# Altium PCB uku207_220_2.PcbDoc (part 1 of 4)
Units mm, origin at the board's own origin, x right, y up, seen from the top; angles counter-clockwise.
Board outline 334.15 x 155.4 mm, 2 copper layers (Top Layer, Bottom Layer); 372 components, 588 nets, 1281 pads, 677 vias.
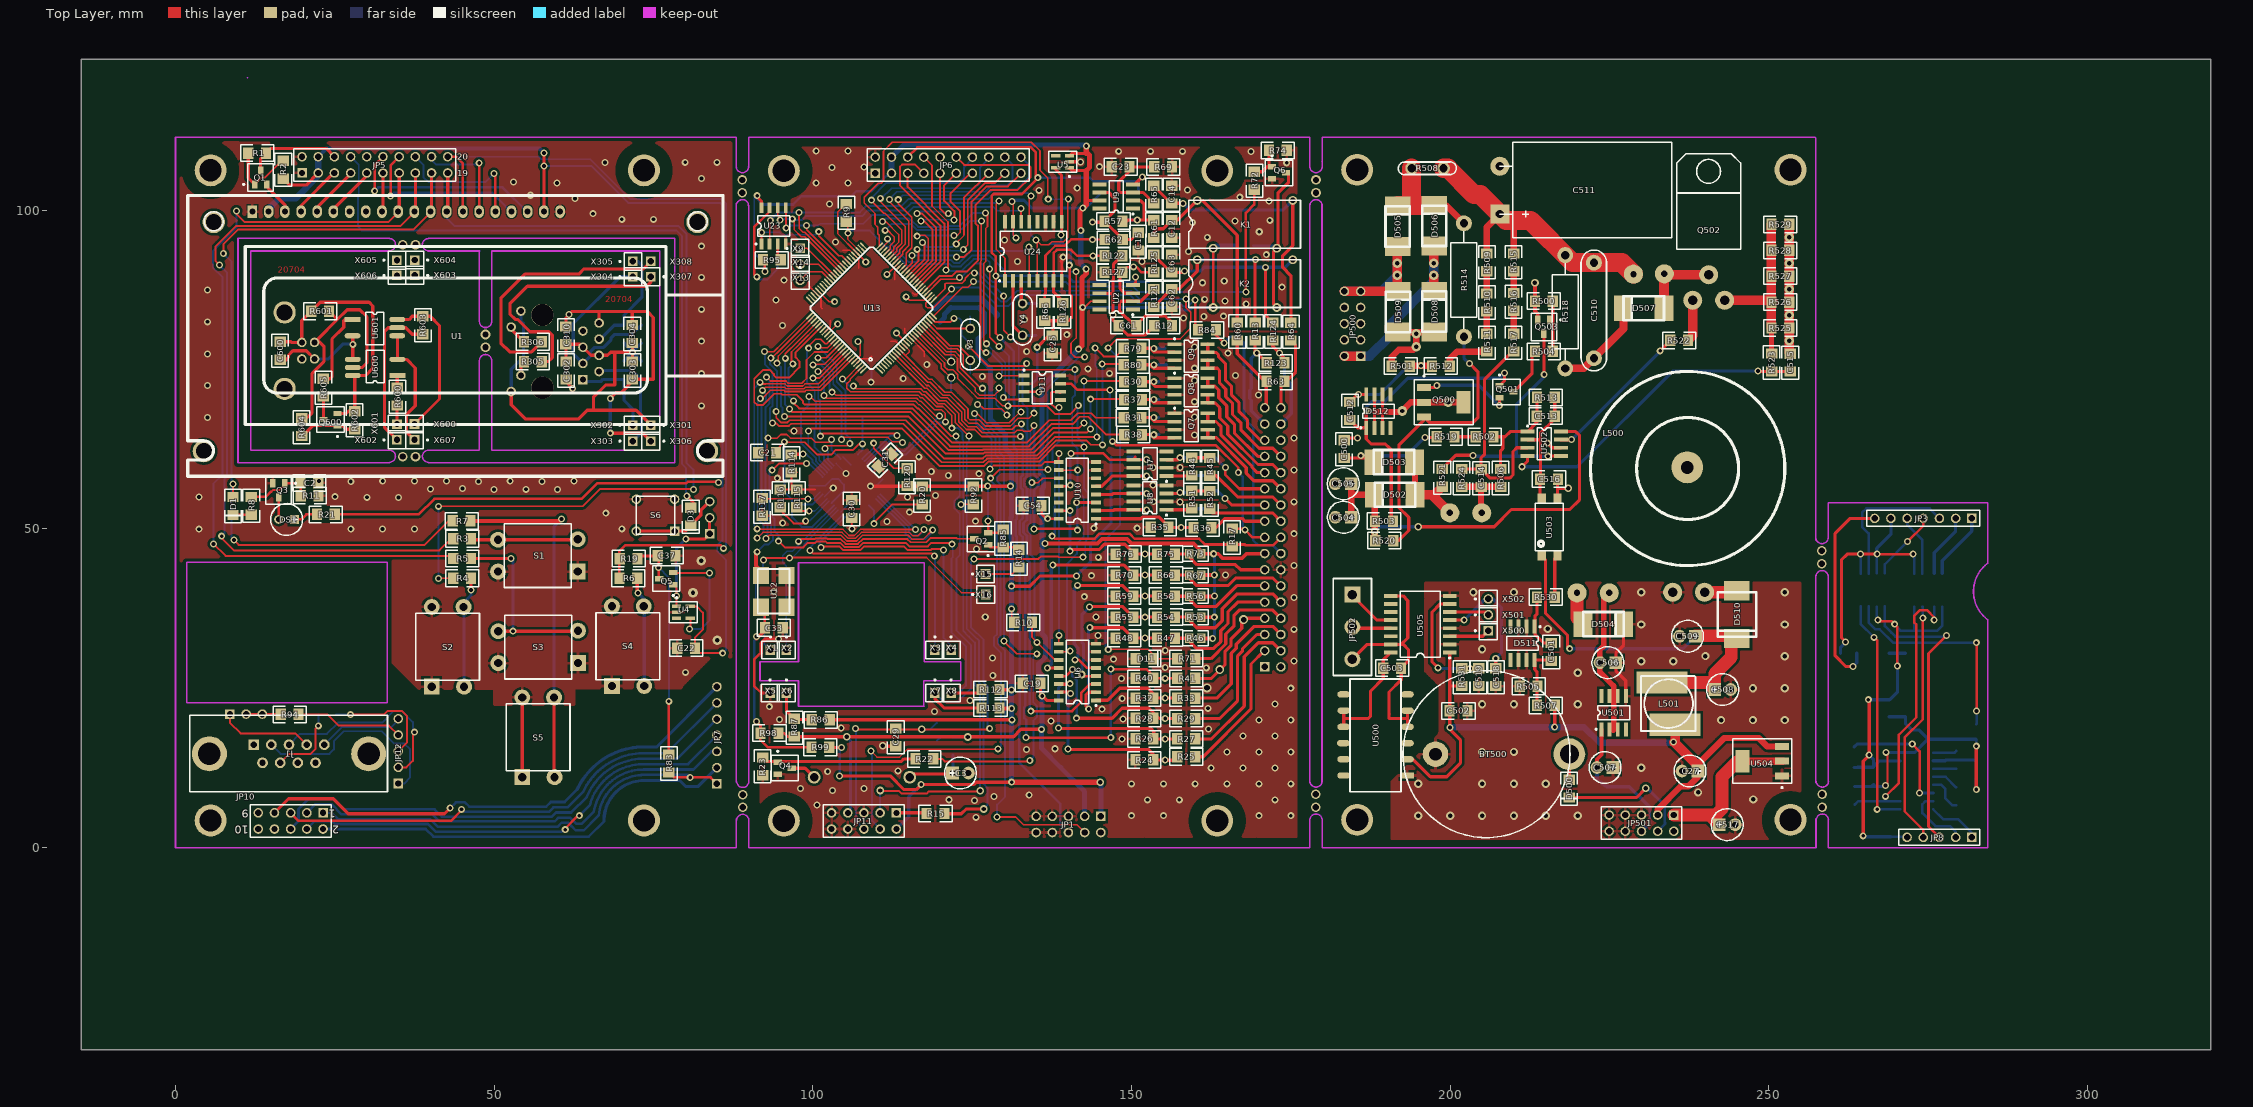
[diagram p0: Top Layer view]
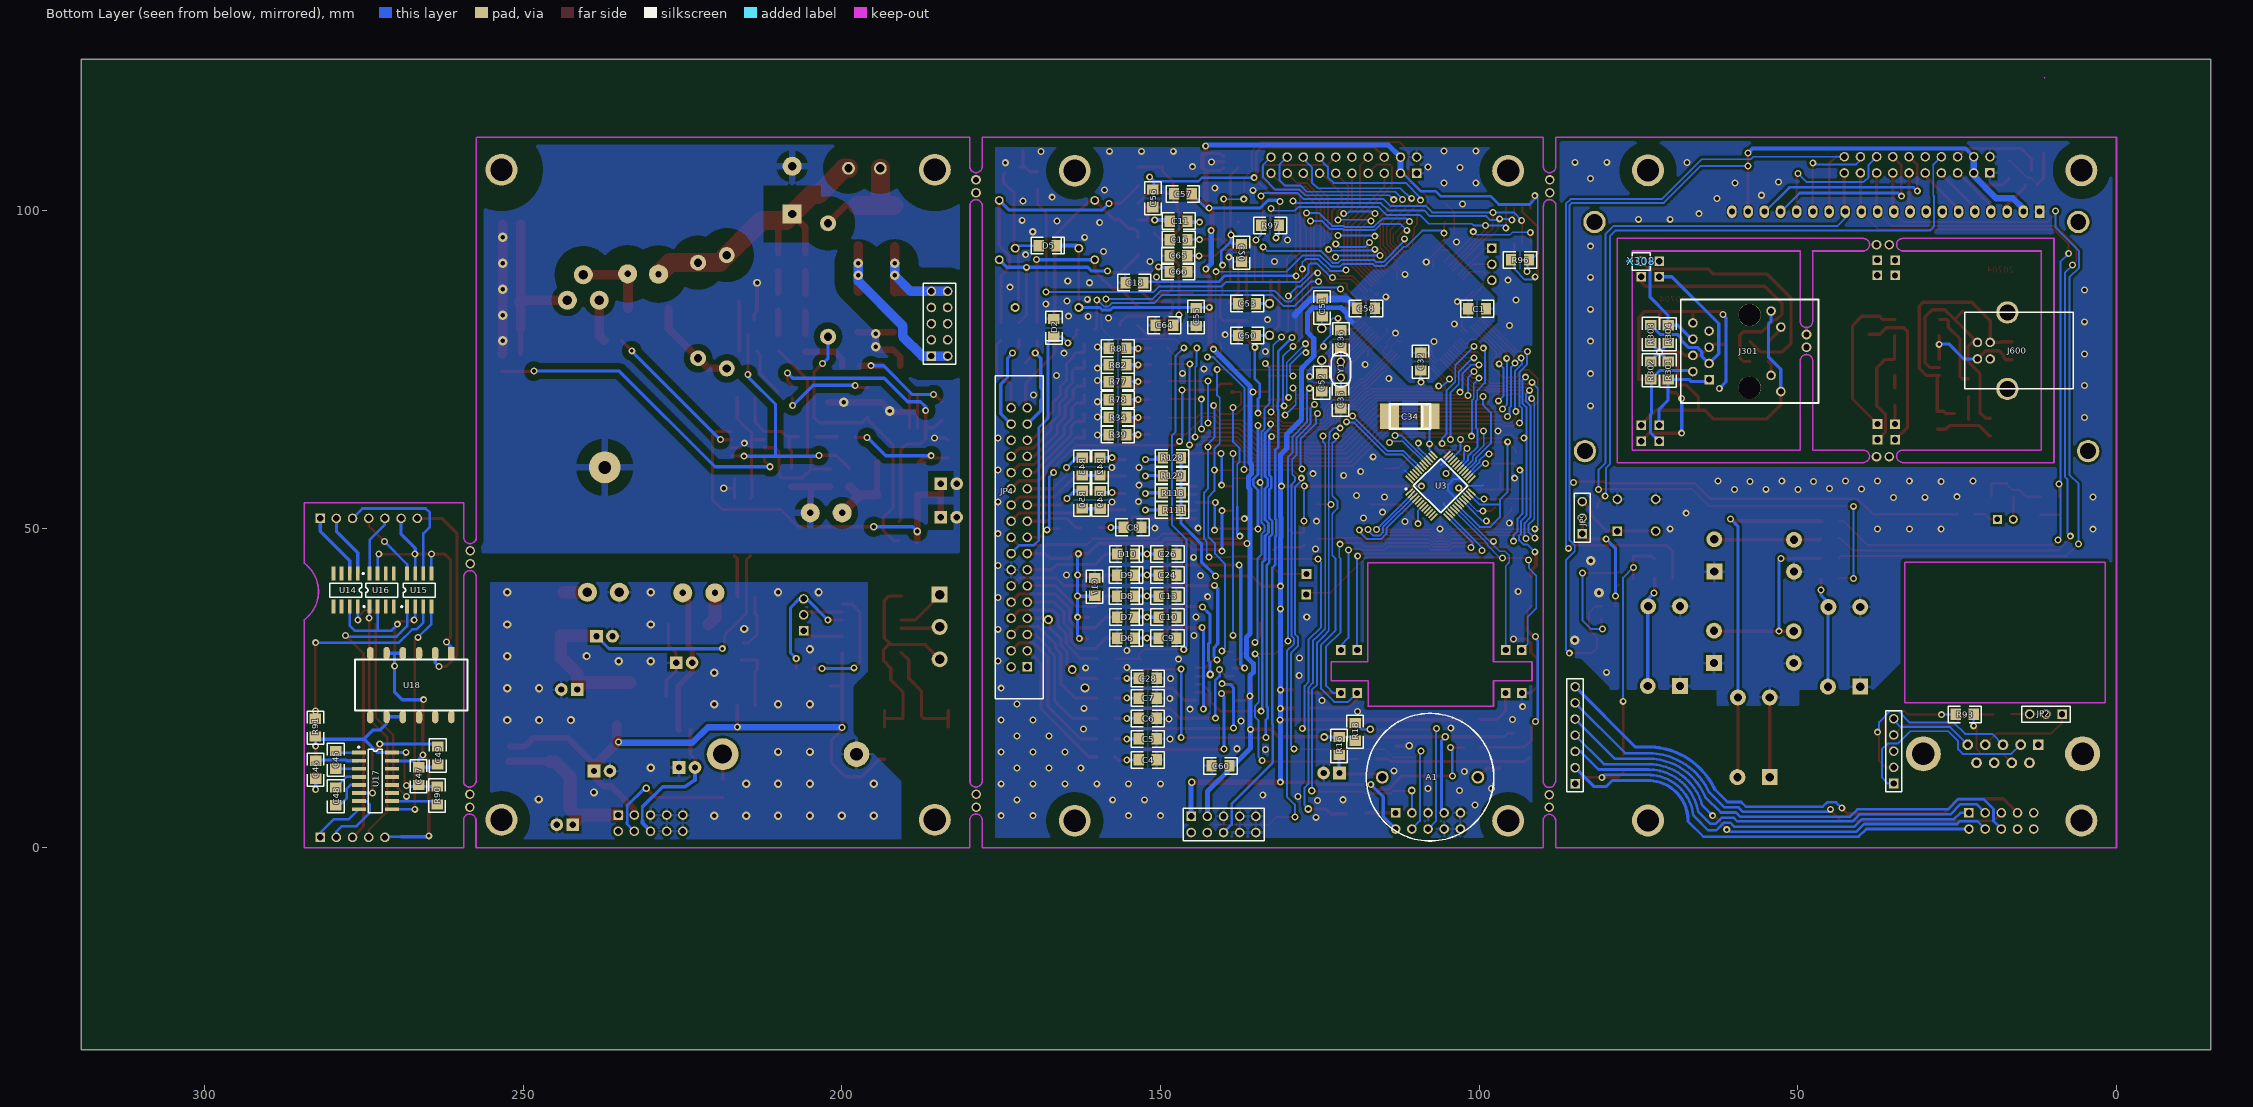
[diagram p1: Bottom Layer view, seen from below]

## Layer stack, top to bottom
Top Layer: signal copper 0.0356
Dielectric: dielectric 0.32, FR-4, Dk 4.8
Bottom Layer: signal copper 0.0356

## Board outline
-14.803,123.7 -14.803,-31.7 319.347,-31.7 319.347,123.7

## Design rules (kind name [scope] priority, off if disabled: settings)
Clearance Clearance_2 [InNet('NetD506_1') or
InNet('NetD505_2') or
InNet('NetC510_2') or
InNet('NetD505_1') or
InNet('NetD507_1') vs InPoly] p1: gap=3
Clearance Clearance_4 [InNet(NetC500_1) vs HasPad('Free-0')] p2: gap=4
Clearance Holes [InPoly vs HasPad('Free-0') Or HasPad('Free-1') Or HasPad('Free-2') Or HasPad('Free-3')] p3: gap=2
Clearance Clearance_3 [InPoly and InNet(NetC500_1)] p4: gap=1
Clearance Clearance_1 [InComponent(U1)] p5: gap=0.19
Clearance Keep_Out [OnLayer('Keep-Out Layer')] p6: gap=0.5
Clearance Poly [InPoly] p7: gap=0.4
Clearance [All] p8: gap=0.18
ComponentClearance [All] p1: gap=0.254 collisioncheckmode=0
HoleSize [All] p1: absolutevalues=TRUE maxlimit=5 minlimit=0.025 maxpercent=80.000 minpercent=20.000
PolygonConnect PolygonConnect_2 [InNet('NetC500_1')] p1: connectstyle=Relief reliefconductorwidth=1 reliefentries=4 polygonreliefangle="90 Angle"
PolygonConnect PolygonConnect_1 [InNet(NetC100_2)] p2: connectstyle=Direct reliefconductorwidth=0.254 reliefentries=4 polygonreliefangle="90 Angle"
PolygonConnect [All] p3: connectstyle=Relief reliefconductorwidth=0.4 reliefentries=4 polygonreliefangle="90 Angle"
RoutingLayers [All] p1: top layer=Horizontal bottom layer=Vertical
RoutingVias [All] p1: holewidth=0.6 width=1.1 viastyle="Through Hole" minholewidth=0.6 minwidth=1.1 maxholewidth=0.7 maxwidth=1.2
SolderMaskExpansion [All] p1: expansion=0.102
TestPointUsage [All] p1: valid=0 allowmultiple=FALSE
Testpoint [All] p1: side=15 testpointundercomponent=TRUE minsize=1.016 maxsize=2.54 preferedsize=1.524 minholesize=0 maxholesize=1.016 preferedholesize=0.813 testpointgrid=0.025 style=1023 order=-539222988
Width [All] p1: maxlimit=5 minlimit=0.2 preferedwidth=0.254 toplayer_prefwidth=0.5 bottomlayer_prefwidth=0.4 minimp=50.000000 maximp=50.000000 favimp=50.000000
15 further rules are at their usual default settings.

## Classes and differential pairs
component class POWER: BT500 C27 C500 C501 C502 C503 C504 C505 C506 C507 C508 C509 C510 C511 C512 C513 C514 C515 C516 C517 C518 C519 D500 D502 D503 D504 D505 D506 D507 D508 D509 D510 D511 D512 JP500 JP501 JP502 L500 L501 Q500 Q501 Q502 Q503 R500 R501 R502 R503 R504 R505 R506 R507 R508 R509 R510 R511 R512 R513 R514 R515 R516 R517 R518 R519 R520 R521 R522 R523 R524 R525 R526 R527 R528 R529 R530 R531 U500 U501 U502 U503 U504 U505 X500 X501 X502
component class LAN: C302 C303 C304 C310 J301 R301 R302 R303 R304 R305 R306 X301 X302 X303 X304 X305 X306 X307 X308
component class uku206: A? BT? C2 C22 C37 D1 D3 DS1 JP5 JP9 Q1 Q3 Q5 R1 R2 R3 R4 R5 R6 R7 R8 R11 R19 R21 R83 S1 S2 S3 S4 S5 S6 U1 U4 UU1 UU3 UU5 UU7 UU9 X17
component class IBPV11: +IAKB1 C4 C5 C6 C7 C8 C9 C10 C11 C12 C13 C14 C15 C16 C17 C18 C19 C20 C23 C24 C25 C26 C28 C61 C62 C63 C64 C65 C66 D5 D6 D7 D8 D9 D10 D11 K1 K2 NetC25_1 NetJ1_2 NetU14_4 NetU14_5 P0_3 P0_8_ P0_9_ P1_29 P1_31 PROG1 Q6 Q7 Q8 Q9 R12 R13 R24 R25 R26 R27 R28 R29 R30 R31 R32 R33 R34 R35 R36 R37 R38 R39 R40 R41 R42 R43 R44 R45 R46 R47 R48 R49 R50 R51 R52 R53 R54 R55 R56 R57 R58 R59 R60 R61 R62 R63 R64 R65 R66 R67 R68 R69 R70 R71 R72 R73 R74 R75 R76 R77 R78 R79 R80 R81 R82 R111 R118 R121 R122 R123 R124 R125 R126 R127 R128 R129 U2 U6 U7 U8 U9 U10 UU2 X39 X40 X41 X42 X43 X44 X45 X46 X47
component class ETH: C21 C30 C31 C32 C33 C34 Q2 R14 R20 R85 R86 R87 R98 R99 R112 R113 R114 R115 R116 R117 R120 U3 U12 X1 X2 X3 X4 X5 X6 X7 X8 X15 X16
component class Designator: C45 C46 C47 C48 C49 J1 JP2 JP3 JP7 JP8 JP10 JP12 R90 R91 R93 R94 U14 U15 U16 U17 U18 X36
component class CPU: A1 C1 C3 C29 C35 C36 C50 C51 C52 C53 C54 C55 C56 C57 C58 C60 D2 JP1 JP4 JP6 JP11 Q4 R9 R10 R15 R16 R17 R18 R22 R23 R84 R92 R95 R96 R97 U5 U11 U13 U23 U24 X9 X13 X14 Y1 Y3 Y4
component class CAN-PDH: C600 J600 Q600 R600 R601 R602 R603 R604 R605 U600 U601 X600 X601 X602 X603 X604 X605 X606 X607

## Components (designator, comment, footprint, x,y, rotation, side; value= is the part's Value field where it differs from the comment)
A1 "EFM260" Pjezo15 102.7,11.05 r0 bottom
BT500 "CR2032" BAT_SUPP 205.7,14.65 r270 top
C1 "1.0" _1206#1 100.3,84.55 r180 bottom
C2 "1.0" _1206#2 21,57.2 r180 top
C3 "100 x 16" el3#1 121.897,11.7 r0 top
C4 "1.0" _1206#3 152,13.75 r180 bottom (schematic designator C11)
C5 "1.0" _1206#3 152,17.05 r180 bottom
C6 "1.0" _1206#3 152,20.25 r180 bottom (schematic designator C7)
C7 "1.0" _1206#3 152,23.45 r180 bottom (schematic designator C13)
C8 "1.0" _1206#3 154.4,50.25 r180 bottom (schematic designator C?)
C9 "1.0" _1206#3 148.9,32.85 r180 bottom (schematic designator C8)
C10 "1.0" _1206#3 148.9,36.15 r180 bottom (schematic designator C16)
C11 "0.1" _1206#3 147.15,98.3 r0 bottom
C12 "1.0" _1206#3 156.3,97.05 r90 top
C13 "1.0" _1206#3 148.9,39.45 r180 bottom
C14 "1.0" _1206#3 156.3,102.45 r270 top
C15 "1.0" _1206#3 151.05,95.074 r90 top
C16 "1.0" _1206#3 147.15,95.4 r180 bottom
C17 "1.0" _1206#3 160.34,40.91 r270 bottom
C18 "1.0" _1206#3 154.1,88.65 r180 bottom
C19 "1.0" _1206#3 134.334,25.75 r0 top
C20 "1.0" _1206#3 137.285,93.303 r90 bottom
C21 "0.1" _1206#4 92.823,61.966 r180 top
C22 "1.0" _1206#1 80.1,31.3 r180 top (schematic designator C?)
C23 "0.1" _1206#3 148.287,106.827 r180 top
C24 "1.0" _1206#3 148.9,42.75 r180 bottom
C25 "1.0" _1206#3 137.6,78.95 r90 top
C26 "1.0" _1206#3 148.9,46.05 r180 bottom
C27 "nichicon 330x16" el3#1 238.897,12 r180 top (schematic designator C?)
C28 "1.0" _1206#3 152,26.55 r180 bottom
C29 "0.1" _1206#4 113,17.3 r90 top
C30 "0.1" _1206#1 106.1,53.1 r270 top
C31 "0.1" _1206#1 111.327,60.764 r45 top
C32 "0.1" _1206#1 109.176,76.218 r270 bottom
C33 "0.1" _1206#1 93.9,34.5 r0 top
C34 "10.0x25 tantal" CAP_EL_6_3 107.7,67.65 r0 bottom
C35 "33" _1206#1 121.75,70.3 r90 bottom
C36 "33" _1206#1 121.7,79.75 r270 bottom
C37 "0.1" _1206#4 77.05,45.8 r180 top
C45 "1.0" _1206#3 279.403,13.747 r90 bottom
C46 "1.0" _1206#1 282.553,12.197 r270 bottom
C47 "1.0" _1206#3 266.403,11.197 r90 bottom
C48 "1.0" _1206#3 279.403,8.047 r270 bottom
C49 "1.0" _1206#3 263.403,14.447 r270 bottom
C50 "10" _1206#1 136.4,80.35 r180 bottom
C51 "10" _1206#3 124.65,84.75 r270 bottom
C52 "10" _1206#3 124.7,72.95 r90 bottom
C53 "10" _1206#1 136.4,85.35 r180 bottom
C54 "1.0" _1206#3 134.484,53.664 r0 top
C55 "1.0" _1206#3 144.4,83.25 r90 bottom
C56 "1.0" _1206#3 151.2,101.85 r90 bottom
C57 "1.0" _1206#3 146.5,102.55 r180 bottom
C58 "1.0" _1206#1 117.75,84.6 r180 bottom
C60 "1.0" _1206#3 140.585,12.803 r180 bottom
C61 "0.1" _1206#3 149.35,81.9 r0 top
C62 "1.0" _1206#3 156.3,86.25 r90 top
C63 "1.0" _1206#3 156.3,91.65 r270 top
C64 "1.0" _1206#3 149.4,81.95 r180 bottom
C65 "1.0" _1206#3 147.2,92.85 r180 bottom
C66 "0.1" _1206#3 147.2,90.35 r180 bottom
C302 "0.1" _1206#4 61.269,74.866 r90 top
C303 "0.1" _1206#4 71.669,74.866 r90 top
C304 "0.1" _1206#4 71.669,80.566 r270 top
C310 "0.1" _1206#4 61.269,80.366 r270 top (schematic designator C301)
C500 "1.0" _1206#4 183.35,62.5 r270 top
C501 "0.1" _1206#4 215.85,30.7 r90 top
C502 "22.0" _1206#1 201.3,21.45 r180 top
C503 "22.0" _1206#1 190.9,28.15 r0 top
C504 "LXZ 22.0x50" el3#1 184.496,51.813 r180 top
C505 "LXZ 22.0x50" el3#1 184.488,57.073 r180 top
C506 "LXZ 22.0x50" el3#1 226.007,29.007 r180 top
C507 "LXZ 22.0x50" el3#1 225.557,12.553 r180 top
C508 "nichicon 330x16" el3#1 241.497,24.8 r0 top
C509 "nichicon 330x16" el3#1 238.5,33.15 r180 top
C510 "0.1x630" c15 222.556,84.271 r90 top
C511 "10.0x450" el_15_25_h 207.797,103.15 r270 top
C512 "10n" _1206#4 184.246,68.517 r90 top
C513 "390" _1206#4 215.004,67.717 r0 top
C514 "1n0" _1206#4 204.85,57.95 r270 top
C515 "1n0" _1206#4 253.35,76.1 r90 top
C516 "3n3" _1206#4 215.504,57.815 r180 top
C517 "LXZ 220x16" el3#1 242.211,3.601 r0 top
C518 "1n0" _1206#1 207.15,26.75 r90 top
C519 "1.0" _1206#1 204.45,26.75 r90 top
C600 "1.0" _1206#3 16.4,77.95 r90 top
D1 "LL4148" _1206d#1 9,53.6 r90 top
D2 "BZV55-C3V9" _1206d#2 166.7,81.55 r90 bottom
D3 "LL4148" _1206d#2 80.85,51.9 r90 top
D5 "LL4148" _1206d#3 167.7,94.45 r0 bottom
D6 "BZV55-C5V6" _1206d#4 155.4,32.85 r0 bottom
D7 "BZV55-C5V6" _1206d#4 155.4,36.15 r0 bottom
D8 "BZV55-C5V6" _1206d#3 155.4,39.45 r0 bottom
D9 "BZV55-C5V6" _1206d#3 155.4,42.75 r0 bottom
D10 "BZV55-C5V6" _1206d#4 155.4,46.05 r0 bottom
D11 "BZV55-C3V9" _1206d#4 152,29.65 r180 top
D500 "LL4148" _1206d#5 218.65,9.25 r90 top
D502 "MBRS1100T3G" D_6_3 188.147,55.364 r0 top
D503 "MBRS1100T3G" D_6_3 188.047,60.465 r0 top
D504 "MBRS1100T3G" D_6_3 227.207,35.059 r180 top
D505 "STTH112" D_6_3 191.748,100.625 r270 top
D506 "STTH112" D_6_3 197.5,100.725 r270 top
D507 "STTH112" D_6_3 227.207,84.621 r0 top
D508 "STTH112" D_6_3 197.5,87.25 r270 top
D509 "STTH112" D_6_3 191.798,87.222 r270 top
D510 "30BQ100" 30BQ100 244.997,36.55 r90 top
D511 "TL431ACD" SO-G8#1 211.35,32.05 r180 top
D512 "TL431ACD" SO-G8#1 188.748,68.467 r0 top
DS1 "LED0" el3#2 18.697,51.477 r180 top
J1 "DBR9M" DSUB_N9 17.75,16.25 r0 top
J301 "J0011D21B" J0011D21B 57.569,77.866 r270 bottom
J600 "USB_B" USB_B 21.8,77.95 r90 bottom
JP1 "PBD-10" HDR2X5#1 145.187,4.901 r180 top
JP2 "PLS-3" HDR1X3#1 8.547,20.95 r0 bottom
JP3 "PLS-7" HDR1X7 281.85,51.647 r180 top
JP4 "IDC-34" IDC34M 170.9,28.35 r90 bottom
JP5 "PLHD-20" HDR2X10 19.85,105.85 r0 top
JP6 "PBD-20" HDR2X10 109.8,105.8 r0 top
JP7 "PLS-7" HDR1X7 84.948,10 r90 top
JP8 "PLS-5" HDR1X5 281.85,1.6 r180 top
JP9 "PLS-3" HDR1X3#2 83.821,49.212 r90 bottom
JP10 "PLHD-10" HDR2X5#1 23.147,5.45 r180 top
JP11 "PBD-10" HDR2X5#2 113.1,5.45 r180 top
JP12 "PLS-5" HDR1X5 34.95,10.05 r90 top
JP500 "IDC-10" HDR2X5#1 185.947,77.119 r90 top
JP501 "PLHD-10" HDR2X5#1 235.098,5.1 r180 top
JP502 "Header 3" 2EDG-5.08-3P 184.65,39.7 r270 top
K1 "DH1A" kuan 160.3,94.05 r0 top
K2 "DH1A" kuan 160.3,84.75 r0 top
L500 "L220-K10" trans_ring1 237.26,59.465 r0 top
L501 "SDR0805-390KL" L10x10 239.36,27.657 r180 top
Q1 "BC856" SO-G3#1 13.35,105.15 r0 top
Q2 "BC856" SO-G3#1 126.4,48.45 r90 top
Q3 "BC846" SO-G3#2 16.2,56.05 r180 top
Q4 "BC846" SO-G3#1 95.6,12.45 r270 top
Q5 "IRLML2402" SO-G3#1 77,42.2 r90 top (schematic designator Q?)
Q6 "BC846" SO-G3#1 173.15,105.877 r270 top
Q7 "IRF7301" SO-G8/Y2.2#1 159.35,66.2 r270 top
Q8 "IRF7301" SO-G8/Y2.2#2 159.35,71.7 r270 top
Q9 "IRF7301" SO-G8/Y2.2#2 159.35,77.1 r270 top
Q500 "NSS40300MZ4" DSO-G3 199,69.868 r270 top
Q501 "BC856" SO-G3#1 208.85,71.5 r270 top
Q502 "STP4NK80Z" TO220_h 240.561,101.376 r0 top
Q503 "BC846" SO-G3#1 214.7,81.7 r180 top
Q600 "BC856" SO-G3#3 24.3,67.15 r90 top
R1 "2K2" _1206#5 12.797,108.95 r180 top (schematic designator R90)
R2 "2K4" _1206#5 16.897,106.35 r270 top (schematic designator R89)
R3 "2K7" _1206#1 44.95,48.45 r180 top
R4 "2K7" _1206#1 44.95,42.25 r180 top
R5 "2K7" _1206#1 44.95,45.35 r180 top
R6 "2K7" _1206#1 71.05,42.25 r180 top
R7 "2K7" _1206#5 44.9,51.25 r180 top (schematic designator R11)
R8 "2K7" _1206#2 11.9,53.6 r270 top
R9 "10K" _1206#1 105.275,99.574 r270 top
R10 "2K7" _1206#1 132.984,35.309 r180 top
R11 "10K" _1206#2 21.05,55.25 r0 top
R12 "20K" _1206#1 154.95,81.9 r180 top
R13 "10R" _1206#1 169.4,80.95 r270 top
R14 "1K0" _1206#1 132.332,45.31 r270 top
R15 "K20" _1206#1 119.25,5.35 r0 top
R16 "1K0" _1206#1 121.981,15.954 r90 bottom
R17 "K10" _1206#3 165.8,48.65 r90 top
R18 "51K" _1206#4 119.45,18.15 r270 bottom
R19 "10K" _1206#4 71.097,45.35 r0 top
R20 "10K" _1206#1 117.15,55.25 r90 top
R21 "K27" _1206#2 23.603,52.277 r0 top
R22 "1K0" _1206#1 117.48,13.904 r180 top
R23 "10K" _1206#1 92.1,12.75 r90 top
R24 "1K0" _1206#1 152,13.75 r180 top
R25 "33K" _1206#1 158.6,14.253 r0 top
R26 "1K0" _1206#1 152,17.05 r180 top
R27 "33K" _1206#1 158.6,17.05 r0 top
R28 "1K0" _1206#1 152,20.25 r180 top
R29 "33K" _1206#1 158.6,20.25 r0 top
R30 "1K0" _1206#1 150.25,73.1 r0 top
R31 "1K0" _1206#1 150.2,67.45 r0 top
R32 "1K0" _1206#1 152,23.45 r180 top
R33 "33K" _1206#1 158.6,23.45 r0 top
R34 "10K" _1206#1 156.7,67.5 r180 bottom
R35 "1K0" _1206#1 154.4,50.25 r180 top (schematic designator R?)
R36 "33K" _1206#1 161.141,50.163 r0 top (schematic designator R?)
R37 "1K0" _1206#1 150.25,70.3 r0 top
R38 "1K0" _1206#5 150.25,64.8 r0 top
R39 "10K" _1206#1 156.7,64.8 r180 bottom
R40 "1K0" _1206#1 152,26.55 r180 top
R41 "10K" _1206#1 158.6,26.55 r0 top
R42 "6K2" _1206#5 159.49,59.765 r90 bottom
R43 "6K2" _1206#1 162.291,59.765 r270 bottom
R44 "6K2" _1206#1 159.49,59.765 r270 top
R45 "6K2" _1206#1 162.291,59.75 r90 top
R46 "1K0" _0805 160,32.85 r0 top
R47 "2K7" _1206#1 155.4,32.85 r180 top
R48 "10K" _1206#1 148.9,32.85 r0 top
R49 "6K2" _1206#1 159.49,54.564 r90 bottom
R50 "6K2" _1206#1 162.291,54.564 r270 bottom
R51 "6K2" _1206#1 159.49,54.564 r270 top
R52 "6K2" _1206#1 162.291,54.564 r90 top
R53 "1K0" _0805 160,36.15 r0 top
R54 "2K7" _1206#1 155.4,36.15 r180 top
R55 "10K" _1206#1 148.9,36.15 r0 top
R56 "1K0" _0805 160,39.45 r0 top
R57 "20K" _1206#1 147.15,98.3 r180 top
R58 "2K7" _1206#1 155.4,39.45 r180 top
R59 "10K" _1206#1 148.9,39.45 r0 top
R60 "10R" _1206#1 166.6,80.95 r270 top
R61 "2K0" _1206#1 153.5,97.05 r90 top
R62 "20K" _1206#1 147.2,95.4 r180 top
R63 "10R" _1206#5 172.6,73.15 r180 top
R64 "10R" _1206#5 175,80.95 r270 top
R65 "2K0" _1206#5 153.5,102.45 r270 top
R66 "20K" _1206#1 136.4,84.05 r270 top
R67 "1K0" _0805 160,42.711 r0 top
R68 "2K7" _1206#1 155.4,42.75 r180 top
R69 "20K" _1206#1 154.95,106.8 r180 top
R70 "10K" _1206#1 148.9,42.75 r0 top
R71 "20K" _1206#1 158.6,29.65 r0 top
R72 "1K0" _1206#5 169.293,104.626 r90 top
R73 "1K0" _0805 160,46.112 r0 top
R74 "10K" _1206#1 172.944,109.378 r180 top
R75 "2K7" _1206#1 155.4,46.05 r180 top
R76 "10K" _1206#5 148.9,46.05 r0 top
R77 "10K" _1206#1 156.7,73.1 r180 bottom
R78 "10K" _1206#1 156.7,70.3 r180 bottom
R79 "1K0" _1206#1 150.2,78.35 r0 top
R80 "1K0" _1206#1 150.2,75.75 r0 top
R81 "10K" _1206#1 156.7,78.35 r180 bottom
R82 "10K" _1206#1 156.7,75.75 r180 bottom
R83 "10K" _1206#4 77.4,13.2 r90 top
R84 "20K" _1206#3 161.839,81.219 r180 top
R85 "K51" _1206#1 129.831,48.511 r90 top
R86 "1R0" _1206#1 101.25,20.05 r0 top
R87 "1R0" _1206#1 97.1,18.8 r270 top
R90 "1K0" _1206#1 263.503,8.147 r270 bottom
R91 "K20" _1206#1 282.6,18.797 r270 bottom
R92 "1K0" _1206#1 125.182,55.25 r90 top
R93 "1K0" _1206#1 23.797,20.9 r180 bottom
R94 "1K0" _1206#1 17.897,20.9 r180 top
R95 "2K7" _1206#1 93.55,92.2 r180 top
R96 "2K7" _1206#1 93.6,92.2 r0 bottom
R97 "1K0" _1206#1 132.783,97.625 r180 bottom
R98 "1R0" _1206#1 93.2,17.95 r0 top
R99 "1R0" _1206#1 101.2,15.75 r0 top
R111 "1K0" _1206#1 148.2,52.95 r0 bottom (schematic designator R?)
R112 "2K2" _1206#1 127.882,24.806 r0 top
R113 "2K2" _1206#1 127.882,21.906 r0 top
R114 "2K2" _1206#1 96.624,60.25 r270 top
R115 "2K2" _1206#1 97.5,54.8 r90 top
R116 "2K2" _1206#1 94.9,54.8 r90 top
R117 "5K1" _1206#1 92.022,53.462 r90 top
R118 "1K0" _1206#1 148.2,55.65 r0 bottom (schematic designator R?)
R120 "2K2" _1206#1 114.8,58.1 r270 top (schematic designator R100)
R121 "2K0" _1206#1 153.5,86.25 r90 top (schematic designator R101)
R122 "20K" _1206#1 147.15,92.85 r180 top (schematic designator R102)
R123 "10R" _1206#1 172.6,76.05 r180 top (schematic designator R103)
R124 "10R" _1206#1 172.2,80.95 r270 top (schematic designator R104)
R125 "2K0" _1206#1 153.5,91.65 r270 top (schematic designator R105)
R126 "20K" _1206#1 139.2,84.05 r270 top (schematic designator R106)
R127 "20K" _1206#1 147.15,90.3 r0 top (schematic designator R107)
R128 "1K0" _1206#1 148.2,61.15 r0 bottom (schematic designator R?)
R129 "1K0" _1206#1 148.2,58.35 r0 bottom (schematic designator R?)
R301 "51R" _1206#1 70.369,74.866 r90 bottom
R302 "51R" _1206#1 73.069,74.866 r270 bottom
R303 "51R" _1206#1 73.069,80.566 r270 bottom
R304 "51R" _1206#1 70.369,80.566 r90 bottom
R305 "K10" _1206#1 56.069,76.266 r0 top
R306 "K10" _1206#1 56.069,79.366 r0 top
R500 "33K" _1206#4 214.7,85.75 r0 top
R501 "2K7" _1206#4 192.248,75.562 r0 top
R502 "6K2" _1206#4 205.4,64.45 r180 top
R503 "2K2" _1206#4 189.6,51.2 r180 top
R504 "2K2" _1206#4 214.698,77.85 r180 top
R505 "2K2" _1206#4 212.3,25.3 r180 top
R506 "2K2" _1206#4 207.9,58 r90 top
R507 "2K2" _1206#4 214.997,22.3 r180 top
R508 "NTC 50R 10" JVR07N 198.95,106.577 r180 top
R509 "M10" _1206#4 205.758,91.823 r90 top
R510 "M10" _1206#4 205.758,85.522 r90 top
R511 "M10" _1206#4 205.758,79.22 r90 top
R512 "M10" _1206#4 198.55,75.562 r0 top
R513 "M10" _1206#4 215.004,70.618 r180 top
R514 "M24" AXIAL-0.7 202.15,89.05 r90 top
R515 "1M" _1206#4 209.947,91.823 r90 top
R516 "1M" _1206#4 209.947,85.62 r90 top
R517 "1M" _1206#4 209.947,79.22 r90 top
R518 "39K" AXIAL-0.7 218.055,84.071 r270 top
R519 "5K1" _1206#4 199.3,64.466 r0 top
R520 "3R" _1206#4 189.65,48.15 r180 top
R521 "51K" _1206#4 198.75,58.015 r90 top
R522 "10" _1206#4 235.909,79.57 r180 top
R523 "K56" _1206#4 250.45,76.1 r270 top
R524 "18K" _1206#4 201.8,58 r90 top
R525 "6R8" _1206#4 251.805,81.529 r0 top
R526 "6R8" _1206#4 251.805,85.593 r0 top
R527 "6R8" _1206#4 251.805,89.656 r0 top
R528 "6R8" _1206#4 251.805,93.72 r0 top
R529 "6R8" _1206#4 251.805,97.783 r0 top
R530 "K18" _1206#4 215.007,39.3 r0 top
R531 "10K" _1206#1 201.8,26.75 r90 top
R600 "K30" _1206#3 34.8,70.75 r90 top
R601 "1K0" _1206#3 22.7,84.15 r180 top
R602 "K51" _1206#3 28.1,67.05 r270 top
R603 "1K0" _1206#3 38.8,81.95 r90 top
R604 "1K0" _1206#3 19.8,65.95 r90 top
R605 "K30" _1206#3 23.2,72.15 r90 top
S1 "SWT-9" SWT-9 63.1,43.3 r180 top (schematic designator S2)
S2 "SWT-9" SWT-9 40.2,25.25 r90 top (schematic designator S4)
S3 "SWT-9" SWT-9 63.15,28.95 r180 top (schematic designator S1)
S4 "SWT-9" SWT-9 68.47,25.35 r90 top (schematic designator S5)
S5 "SWT-9" SWT-9 54.4,11.05 r90 top (schematic designator S3)
S6 "SWT-6" SWT-6 78.3,49.65 r180 top
U1 "AG1232G" AG1232G 43.95,80.35 r0 top (schematic designator U4)
U2 "OP07CS" SO-G8#1 147.6,86.35 r90 top
U3 "DP8348C" F-QFP7X7-G48/N 106.05,56.8 r135 bottom
U4 "TPS3823-5.0" SO-G5/P.95 79.7,36.9 r270 top (schematic designator U?)
U5 "TPS76333" SO-G5/P.95 139.184,107.6 r90 top
U6 "MC14051BD" SO-G16/C5.85#1 141.5,27.55 r90 top
U7 "MOCD217" SO-G8#2 152.889,60.215 r90 top
U8 "MOCD217" SO-G8#1 152.889,54.914 r90 top
U9 "OP07CS" SO-G8#2 147.6,102.15 r90 top
U10 "MC14051BD" SO-G16/C5.85#2 141.5,56.05 r90 top
U11 "TJA1050" SO-G8/D5 136,72.15 r270 top
U12 "KXO-97-50MGz" KXO-97 93.85,40.2 r90 top
U13 "LPC1766FBD100" LPC2368 109.2,84.65 r45 top
U14 "MOCD217" SO-G8#1 277.85,40.397 r0 bottom
U15 "MOCD217" SO-G8#1 266.3,40.397 r180 bottom
U16 "MOCD217" SO-G8#1 272.2,40.397 r180 bottom
U17 "MAX232ESE" SO-G16 273.203,10.447 r270 bottom
U18 "DET01L-05" SBT01DET01#1 261.25,30.497 r0 bottom
U23 "25LC640" SO-G8/D5 93.85,97.55 r0 top
U24 "AD7705" SO-G16/D10.4 134.6,93.55 r0 top
U500 "SBT01L-05" SBT01DET01#2 193.297,11.3 r90 top
U501 "L79L05ACD" SO-G8#1 225.657,21.155 r0 top
U502 "L6565" so-g8 214.754,63.366 r270 top
U503 "FOD817ASD" FOD817ASD 214.35,45.8 r0 top
U504 "REG1117-3.3" DSO-G3 248.963,13.553 r90 top
U505 "ADM2483" SO-G16/D10.4 195.297,35.05 r90 top
U600 "TLP115" tlp115 34.8,74.05 r180 top
U601 "TLP115" tlp115 27.8,82.85 r0 top
X1 "" PIN1#1 93.35,31 r0 top
X2 "" PIN1#1 95.85,31 r0 top
X3 "" PIN1#1 119.15,31 r0 top
X4 "" PIN1#2 121.7,31 r0 top
X5 "" PIN1#2 93.3,24.25 r0 top
X6 "" PIN1#2 95.85,24.25 r0 top
X7 "" PIN1#2 119.15,24.25 r0 top
X8 "" PIN1#2 121.7,24.25 r0 top
X9 "" PIN1#3 98,94 r90 top
X13 "" PIN1#4 98,89 r0 top
X14 "" PIN1#4 98,91.5 r0 top
X15 "" PIN1#2 127.091,42.919 r90 top
X16 "" PIN1#2 127.131,39.709 r90 top
X301 "" PIN1#1 74.569,66.266 r270 top
X302 "" PIN1#1 71.769,66.266 r90 top
X303 "" PIN1#1 71.769,63.766 r90 top
X304 "" PIN1#1 71.769,89.566 r90 top
X305 "" PIN1#1 71.769,91.966 r90 top
X306 "" PIN1#1 74.569,63.766 r270 top
X307 "" PIN1#1 74.569,89.566 r270 top
X308 "" PIN1#1 74.569,91.966 r90 bottom
X500 "" PIN1#3 206,34 r90 top
X501 "" PIN1#5 206,36.5 r90 top
X502 "" PIN1#5 206,39 r90 top
X600 "" PIN1#6 37.5,66.45 r270 top
X601 "" PIN1#6 34.746,66.462 r90 top
X602 "" PIN1#6 34.741,63.973 r90 top
X603 "" PIN1#6 37.519,89.773 r270 top
X604 "" PIN1#6 37.519,92.173 r270 top
X605 "" PIN1#6 34.741,92.173 r90 top
X606 "" PIN1#6 34.741,89.773 r90 top
X607 "" PIN1#6 37.5,63.95 r270 top
Y1 "32768" QWARZ2 121.705,76.249 r270 bottom
Y3 "10MGz" QWARZ1 124.7,81.45 r270 top
Y4 "4,9152MGz" QWARZ1 132.9,80.35 r90 top

## Footprints (in the part's own frame and the unit in brackets; to place one, negate y for a bottom-side part, rotate by r counter-clockwise, add the part's x,y. Pads: shape width x height; smd on the part's side, far side on the other; paste and mask are expansions set on the pad)
2EDG-5.08-3P [mm]
  rect 2.5x2.5 hole 1.5: 1(0,0)
  round 2.5 hole 1.5: 2(5.08,0) 3(10.16,0)
  silkscreen extent -2.5,-3 12.7,3
30BQ100 [mm]
  rect 3x4 smd: 1(3.75,0) 2(-3.75,0)
  silkscreen extent -3.5,-3 3.5,3
_0805 [mm]
  rect 1.3x1.5 smd: 1(-0.942,-0.005) 2(0.958,-0.005)
  silkscreen extent -1.99,-1.16 2.01,1.14
_1206#1 [mm]
  rect 1.6x1.8 smd: 1(-1.412,-0.007) 2(1.388,-0.007)
  silkscreen extent -2.61,-1.31 2.59,1.29
_1206#2 [mm]
  rect 1.6x1.8 smd: 1(-1.409,-0.014) 2(1.391,-0.015)
  silkscreen extent -2.61,-1.31 2.59,1.29
_1206#3 [mm]
  rect 1.6x1.8 smd: 1(-1.397,0.003) 2(1.403,0.003)
  silkscreen extent -2.6,-1.3 2.6,1.3
_1206#4 [mm]
  rect 1.6x1.8 smd: 1(-1.408,-0.007) 2(1.392,-0.007)
  silkscreen extent -2.61,-1.31 2.59,1.29
_1206#5 [mm]
  rect 1.6x1.8 smd: 1(-1.4,0) 2(1.4,0)
  silkscreen extent -2.6,-1.3 2.6,1.3
_1206d#1 [mm]
  rect 1.6x1.8 smd: 1(1.403,-0.017) 2(-1.397,-0.017)
  silkscreen extent -2.6,-1.32 2.6,1.28
_1206d#2 [mm]
  rect 1.6x1.8 smd: 1(1.405,0.012) 2(-1.395,0.012)
  silkscreen extent -2.6,-1.29 2.6,1.31
_1206d#3 [mm]
  rect 1.6x1.8 smd: 1(1.4,0) 2(-1.4,0)
  silkscreen extent -2.6,-1.3 2.6,1.3
_1206d#4 [mm]
  rect 1.6x1.8 smd: 1(1.395,-0.009) 2(-1.405,-0.009)
  silkscreen extent -2.6,-1.31 2.6,1.29
_1206d#5 [mm]
  rect 1.6x1.8 smd: 1(1.397,-0.001) 2(-1.403,-0.001)
  silkscreen extent -2.6,-1.3 2.6,1.3
AG1232G [mm]
  rect 1.5x2 hole 0.95: 1(-31.877,19.431)
  oval 1.5x2 hole 0.95: 2(-29.337,19.431) 3(-26.797,19.431) 4(-24.257,19.431) 5(-21.717,19.431) 6(-19.177,19.431) 7(-16.637,19.431) 8(-14.097,19.431) 9(-11.557,19.431) 10(-9.017,19.431) 11(-6.477,19.431) 12(-3.937,19.431) 13(-1.397,19.431) 14(1.143,19.431) 15(3.683,19.431) 16(6.223,19.431) 17(8.763,19.431) 18(11.303,19.431) 19(13.843,19.431) 20(16.383,19.431)
  silkscreen extent -42.04,-22.1 41.96,21.97
AXIAL-0.7 [mm]
  round 2.5 hole 1.3: 1(-8.887,-0.008) 2(8.893,-0.008)
  silkscreen extent -7.62,-2.04 7.62,2.02
BAT_SUPP [mm]
  round 5 hole 3: 1(-0.009,12.995)
  round 4 hole 2: 2(-0.009,-8.005)
  silkscreen extent -13.11,-13.1 13.09,13.09
c15 [mm]
  round 2.5 hole 1.3: 1(-7.5,0) 2(7.5,0)
  silkscreen extent -9.48,-2 9.48,2
CAP_EL_6_3 [mm]
  rect 3x4 smd: 1(-0.011,0.006) 2(6.339,0.006)
  silkscreen extent -0.01,-1.9 6.34,1.91
D_6_3 [mm]
  rect 3x4 smd: 1(6.341,0.006) 2(-0.009,0.006)
  silkscreen extent -0.01,-1.9 6.34,1.91
DSO-G3 [mm]
  rect 1.1x2.15 smd: 1(-2.3,-3.1) 2(0,-3.1) 3(2.3,-3.1)
  rect 3.5x2.15 smd: 4(0,3.1)
  silkscreen extent -4.27,-4.6 3.5,4.6
DSUB_N9 [mm]
  rect 1.69x1.69 hole 1: 1(-5.481,-0.116)
  round 1.69 hole 1: 2(-2.711,-0.116) 3(0.059,-0.116) 4(2.829,-0.116) 5(5.599,-0.116) 6(-4.096,-2.956) 7(-1.326,-2.956) 8(1.444,-2.956) 9(4.214,-2.956)
  round 5.5 hole 3.5: 10(-12.436,-1.536) 11(12.554,-1.536)
  silkscreen extent -15.49,-7.51 15.51,4.49
el3#1 [mm]
  rect 2x2 hole 1: 1(0.011,-0.008)
  round 2 hole 1: 2(2.511,-0.008)
  silkscreen extent -1.23,-2.51 3.76,2.49
el3#2 [mm]
  rect 1.4x1.4 hole 0.85: 1(0.012,-0.009)
  round 1.4 hole 0.85: 2(2.512,-0.009)
  silkscreen extent -1.24,-2.51 3.76,2.49
el_15_25_h [mm]
  rect 3x3 hole 1.3: 1(3.75,0)
  round 3 hole 1.3: 2(-3.75,0)
  silkscreen extent -7.5,0 7.5,27
F-QFP7X7-G48/N [mm]
  rect 1.55x0.3 smd: 1(-4.192,2.749) 2(-4.192,2.249) 3(-4.192,1.749) 4(-4.192,1.249) 5(-4.192,0.749) 6(-4.192,0.249) 7(-4.192,-0.251) 8(-4.192,-0.751) 9(-4.192,-1.251) 10(-4.192,-1.751) 11(-4.192,-2.251) 12(-4.192,-2.751) 25(4.158,-2.751) 26(4.158,-2.251) 27(4.158,-1.751) 28(4.158,-1.251) 29(4.158,-0.751) 30(4.158,-0.251) 31(4.158,0.249) 32(4.158,0.749) 33(4.158,1.249) 34(4.158,1.749) 35(4.158,2.249) 36(4.158,2.749)
  rect 0.3x1.55 smd: 13(-2.767,-4.176) 14(-2.267,-4.176) 15(-1.767,-4.176) 16(-1.267,-4.176) 17(-0.767,-4.176) 18(-0.267,-4.176) 19(0.233,-4.176) 20(0.733,-4.176) 21(1.233,-4.176) 22(1.733,-4.176) 23(2.233,-4.176) 24(2.733,-4.176) 37(2.733,4.174) 38(2.233,4.174) 39(1.733,4.174) 40(1.233,4.174) 41(0.733,4.174) 42(0.233,4.174) 43(-0.267,4.174) 44(-0.767,4.174) 45(-1.267,4.174) 46(-1.767,4.174) 47(-2.267,4.174) 48(-2.767,4.174)
  silkscreen extent -4.32,-3 2.98,3.57
FOD817ASD [mm]
  rect 1.3x1.5 smd: 1(0,0) 2(2.5,0) 3(2.5,9) 4(0,9)
  silkscreen extent -0.97,0.75 3.4,8.22
HDR1X3#1 [mm]
  rect 1.5x1.5 hole 1: 1(-0.009,0.011)
  round 1.5 hole 1: 2(2.531,0.011) 3(5.071,0.011)
  silkscreen extent -1.28,-1.26 6.34,1.28
HDR1X3#2 [mm]
  rect 1.5x1.5 hole 1: 1(0,0)
  round 1.5 hole 1: 2(2.54,0) 3(5.08,0)
  silkscreen extent -1.27,-1.27 6.35,1.27
HDR1X5 [mm]
  rect 1.5x1.5 hole 1: 1(0,0)
  round 1.5 hole 1: 2(2.54,0) 3(5.08,0) 4(7.62,0) 5(10.16,0)
  silkscreen extent -1.27,-1.27 11.43,1.27
HDR1X7 [mm]
  rect 1.5x1.5 hole 1: 1(0,0)
  round 1.5 hole 1: 2(2.54,0) 3(5.08,0) 4(7.62,0) 5(10.16,0) 6(12.7,0) 7(15.24,0)
  silkscreen extent -1.27,-1.27 16.51,1.27
HDR2X5#1 [mm]
  rect 1.5x1.5 hole 1: 1(0,0)
  round 1.5 hole 1: 2(0,2.54) 3(2.54,0) 4(2.54,2.54) 5(5.08,0) 6(5.08,2.54) 7(7.62,0) 8(7.62,2.54) 9(10.16,0) 10(10.16,2.54)
HDR2X5#2 [mm]
  rect 1.5x1.5 hole 0.95: 1(0,0)
  round 1.5 hole 0.95: 2(0,2.54) 3(2.54,0) 4(2.54,2.54) 5(5.08,0) 6(5.08,2.54) 7(7.62,0) 8(7.62,2.54) 9(10.16,0) 10(10.16,2.54)
  silkscreen extent -1.27,-1.27 11.43,3.81
HDR2X10 [mm]
  rect 1.5x1.5 hole 1: 1(0,0)
  round 1.5 hole 1: 2(0,2.54) 3(2.54,0) 4(2.54,2.54) 5(5.08,0) 6(5.08,2.54) 7(7.62,0) 8(7.62,2.54) 9(10.16,0) 10(10.16,2.54) 11(12.7,0) 12(12.7,2.54) 13(15.24,0) 14(15.24,2.54) 15(17.78,0) 16(17.78,2.54) 17(20.32,0) 18(20.32,2.54) 19(22.86,0) 20(22.86,2.54)
  silkscreen extent -1.27,-1.27 24.13,3.81
IDC34M [mm]
  rect 1.5x1.5 hole 1: 1(0,0)
  round 1.5 hole 1: 2(0,2.54) 3(2.54,0) 4(2.54,2.54) 5(5.08,0) 6(5.08,2.54) 7(7.62,0) 8(7.62,2.54) 9(10.16,0) 10(10.16,2.54) 11(12.7,0) 12(12.7,2.54) 13(15.24,0) 14(15.24,2.54) 15(17.78,0) 16(17.78,2.54) 17(20.32,0) 18(20.32,2.54) 19(22.86,0) 20(22.86,2.54) 21(25.4,0) 22(25.4,2.54) 23(27.94,0) 24(27.94,2.54) 25(30.48,0) 26(30.48,2.54) 27(33.02,0) 28(33.02,2.54) 29(35.56,0) 30(35.56,2.54) 31(38.1,0) 32(38.1,2.54) 33(40.64,0) 34(40.64,2.54)
  silkscreen extent -5,-2.5 45.7,5
J0011D21B [mm]
  round 3.5 hole 3.5: 0(-5.7,0) 0(5.7,0)
  rect 1.5x1.5 hole 0.95: 1(4.445,-6.35)
  round 1.5 hole 0.95: 2(3.175,-8.9) 3(1.905,-6.35) 4(0.635,-8.9) 5(-0.635,-6.35) 6(-1.905,-8.9) 7(-3.175,-6.35) 8(-4.445,-8.9) 9(6.31,4.9) 10(3.77,3.38) 11(-3.8,4.9) 12(-6.31,3.38)
  silkscreen extent -8.1,-10.8 8.1,10.8
JVR07N [mm]
  round 2 hole 1.3: 1(-0.004,-0.002) 2(4.996,-0.002)
  silkscreen extent -2.02,-1.02 7.09,1.01
kuan [mm]
  round 1.4 hole 0.85: 1(15.006,7.49) 3(0.006,7.49) 4(2.506,-0.01) 5(12.506,-0.01)
  silkscreen extent -1.34,-0.01 16.21,7.49
KXO-97 [mm]
  rect 2.7x2.5 smd: 1(-2.5,-2) 2(2.5,-2) 3(2.5,2) 4(-2.5,2)
  silkscreen extent -3.5,-2.5 3.5,2.5
L10x10 [mm]
  rect 8x3.5 smd: 1(4.075,8.372) 2(6.107,1.768)
  silkscreen extent 0.9,0.75 9.41,9.39
LPC2368 [mm]
  rect 0.25x1.5 smd: 1(-6,-7.775)
  oval 0.25x1.5 smd: 2(-5.5,-7.75) 3(-5,-7.75) 4(-4.5,-7.75) 5(-4,-7.75) 6(-3.5,-7.75) 7(-3,-7.75) 8(-2.5,-7.75) 9(-2,-7.75) 10(-1.5,-7.75) 11(-1,-7.75) 12(-0.5,-7.75) 13(0,-7.75) 14(0.5,-7.75) 15(1,-7.75) 16(1.5,-7.75) 17(2,-7.75) 18(2.5,-7.75) 19(3,-7.75) 20(3.5,-7.75) 21(4,-7.75) 22(4.5,-7.75) 23(5,-7.75) 24(5.5,-7.75) 25(6,-7.75) 51(6,7.75) 52(5.5,7.75) 53(5,7.75) 54(4.5,7.75) 55(4,7.75) 56(3.5,7.75) 57(3,7.75) 58(2.5,7.75) 59(2,7.75) 60(1.5,7.75) 61(1,7.75) 62(0.5,7.75) 63(0,7.75) 64(-0.5,7.75) 65(-1,7.75) 66(-1.5,7.75) 67(-2,7.75) 68(-2.5,7.75) 69(-3,7.75) 70(-3.5,7.75) 71(-4,7.75) 72(-4.5,7.75) 73(-5,7.75) 74(-5.5,7.75) 75(-6,7.75)
  oval 1.5x0.25 smd: 26(7.75,-6) 27(7.75,-5.5) 28(7.75,-5) 29(7.75,-4.5) 30(7.75,-4) 31(7.75,-3.5) 32(7.75,-3) 33(7.75,-2.5) 34(7.75,-2) 35(7.75,-1.5) 36(7.75,-1) 37(7.75,-0.5) 38(7.75,0) 39(7.75,0.5) 40(7.75,1) 41(7.75,1.5) 42(7.75,2) 43(7.75,2.5) 44(7.75,3) 45(7.75,3.5) 46(7.75,4) 47(7.75,4.5) 48(7.75,5) 49(7.75,5.5) 50(7.75,6) 76(-7.75,6) 77(-7.75,5.5) 78(-7.75,5) 79(-7.775,4.475) 80(-7.75,4) 81(-7.75,3.5) 82(-7.75,3) 83(-7.75,2.5) 84(-7.75,2) 85(-7.75,1.5) 86(-7.75,1) 87(-7.75,0.5) 88(-7.75,0) 89(-7.75,-0.5) 90(-7.75,-1) 91(-7.75,-1.5) 92(-7.75,-2) 93(-7.75,-2.5) 94(-7.775,-3.025) 95(-7.75,-3.5) 96(-7.75,-4) 97(-7.75,-4.5) 98(-7.75,-5) 99(-7.75,-5.5) 100(-7.75,-6)
  silkscreen extent -6.93,-6.93 6.93,6.93
PIN1#1 [mm]
  rect 1.5x1.5 hole 1: 1(0,0)
  silkscreen extent -1.4,-1.4 1.4,2.17
PIN1#2 [mm]
  rect 1.5x1.5 hole 0.95: 1(0,0)
  silkscreen extent -1.4,-1.4 1.4,2.17
PIN1#3 [mm]
  rect 1.5x1.5 hole 1: 1(0.012,0.005)
  silkscreen extent -1.39,-1.4 1.41,2.18
PIN1#4 [mm]
  round 1.5 hole 1: 1(0,0)
  silkscreen extent -1.4,-1.4 1.4,2.17
PIN1#5 [mm]
  round 1.5 hole 1: 1(0.012,0.005)
  silkscreen extent -1.39,-1.4 1.41,2.18
PIN1#6 [mm]
  rect 1.5x1.5 hole 1: 1(-0.009,-0.003)
  silkscreen extent -1.41,-1.4 1.39,2.17
Pjezo15 [mm]
  round 2 hole 1.3: 1(-2.503,0.012) 2(12.497,0.012)
  silkscreen extent -5.02,-10 15.01,10.02
QWARZ1 [mm]
  round 1.5 hole 1: 1(0.008,0) 2(5.008,0)
  silkscreen extent -1.49,-1.5 6.51,1.5
QWARZ2 [mm]
  round 1.3 hole 0.85: 1(0.001,0.005) 2(2.501,0.005)
  silkscreen extent -1.5,-1.5 4,1.5
SBT01DET01#1 [mm]
  rect 1x2 smd: 1(0.004,0.006)
  oval 1x2 smd: 2(2.554,0.006) 3(5.079,0.006) 4(7.629,0.006) 4(10.179,0.006) 5(7.629,10.006) 5(10.179,9.981) 6(5.079,10.056) 7(2.554,10.006) 8(0.004,10.006) 10(12.729,0.006) 11(12.729,10.006)
  silkscreen extent -2.55,1.01 15.15,9.01
SBT01DET01#2 [mm]
  rect 1x2 smd: 1(0.007,0.007)
  oval 1x2 smd: 2(2.557,0.007) 3(5.082,0.007) 4(7.632,0.007) 4(10.182,0.007) 5(7.632,10.007) 5(10.182,9.982) 6(5.082,10.057) 7(2.557,10.007) 8(0.007,10.007) 10(12.732,0.007) 11(12.732,10.007)
  silkscreen extent -2.54,1.01 15.16,9.01
SO-G3#1 [mm]
  rect 0.85x1.3 smd: 1(-0.948,-1.102) 2(0.952,-1.102) 3(0.002,1.098)
  silkscreen extent -2.77,-2.15 2,2.15
SO-G3#2 [mm]
  rect 0.85x1.3 smd: 1(-0.944,-1.105) 2(0.956,-1.105) 3(0.006,1.095)
  silkscreen extent -2.77,-2.16 2.01,2.14
SO-G3#3 [mm]
  rect 0.85x1.3 smd: 1(-0.938,-1.106) 2(0.962,-1.106) 3(0.012,1.094)
  silkscreen extent -2.76,-2.16 2.01,2.14
SO-G5/P.95 [mm]
  rect 0.55x1.45 smd: 1(-0.95,-1.075) 2(0,-1.075) 3(0.95,-1.075) 4(0.95,1.075) 5(-0.95,1.075)
  silkscreen extent -2.42,-2.2 1.65,2.2
SO-G8#1 [mm]
  rect 0.6x2.2 smd: 1(-1.905,-2.6) 2(-0.635,-2.6) 3(0.635,-2.6) 4(1.905,-2.6) 5(1.905,2.6) 6(0.635,2.6) 7(-0.635,2.6) 8(-1.905,2.6)
  silkscreen extent -2.88,-2.72 2.5,1.1
SO-G8#2 [mm]
  rect 0.6x2.2 smd: 1(-1.902,-2.611) 2(-0.632,-2.611) 3(0.638,-2.611) 4(1.908,-2.611) 5(1.908,2.589) 6(0.638,2.589) 7(-0.632,2.589) 8(-1.902,2.589)
  silkscreen extent -2.88,-2.74 2.5,1.09
so-g8 [mm]
  rect 0.6x2.2 smd: 1(-1.905,-2.6) 2(-0.635,-2.6) 3(0.635,-2.6) 4(1.905,-2.6) 5(1.905,2.6) 6(0.635,2.6) 7(-0.635,2.6) 8(-1.905,2.6)
  silkscreen extent -2.88,-2.72 2.5,1.1
SO-G8/D5 [mm]
  rect 0.6x1.7 smd: 1(-1.905,-2.85) 2(-0.635,-2.85) 3(0.635,-2.85) 4(1.905,-2.85) 5(1.905,2.85) 6(0.635,2.85) 7(-0.635,2.85) 8(-1.905,2.85)
  silkscreen extent -2.88,-2.97 2.5,1.6
SO-G8/Y2.2#1 [mm]
  rect 0.55x2.2 smd: 1(-1.91,-2.588) 2(-0.64,-2.588) 3(0.63,-2.588) 4(1.9,-2.588) 5(1.9,2.612) 6(0.63,2.612) 7(-0.64,2.612) 8(-1.91,2.612)
  silkscreen extent -2.86,-2.71 2.49,1.11
SO-G8/Y2.2#2 [mm]
  rect 0.55x2.2 smd: 1(-1.905,-2.6) 2(-0.635,-2.6) 3(0.635,-2.6) 4(1.905,-2.6) 5(1.905,2.6) 6(0.635,2.6) 7(-0.635,2.6) 8(-1.905,2.6)
  silkscreen extent -2.85,-2.72 2.5,1.1
SO-G16 [mm]
  rect 0.6x2.2 smd: 1(-4.453,-2.589) 2(-3.183,-2.589) 3(-1.913,-2.589) 4(-0.643,-2.589) 5(0.627,-2.589) 6(1.897,-2.589) 7(3.167,-2.589) 8(4.437,-2.589) 9(4.437,2.611) 10(3.167,2.611) 11(1.897,2.611) 12(0.627,2.611) 13(-0.643,2.611) 14(-1.913,2.611) 15(-3.183,2.611) 16(-4.453,2.611)
  silkscreen extent -5.43,-2.71 4.99,1.11
SO-G16/C5.85#1 [mm]
  rect 0.6x1.55 smd: 1(-4.452,-2.93) 2(-3.182,-2.93) 3(-1.912,-2.93) 4(-0.642,-2.93) 5(0.628,-2.93) 6(1.898,-2.93) 7(3.168,-2.93) 8(4.438,-2.93) 9(4.438,2.92) 10(3.168,2.92) 11(1.898,2.92) 12(0.628,2.92) 13(-0.642,2.92) 14(-1.912,2.92) 15(-3.182,2.92) 16(-4.452,2.92)
  silkscreen extent -5.4,-3.05 4.99,1.75
SO-G16/C5.85#2 [mm]
  rect 0.6x1.55 smd: 1(-4.445,-2.925) 2(-3.175,-2.925) 3(-1.905,-2.925) 4(-0.635,-2.925) 5(0.635,-2.925) 6(1.905,-2.925) 7(3.175,-2.925) 8(4.445,-2.925) 9(4.445,2.925) 10(3.175,2.925) 11(1.905,2.925) 12(0.635,2.925) 13(-0.635,2.925) 14(-1.905,2.925) 15(-3.175,2.925) 16(-4.445,2.925)
  silkscreen extent -5.39,-3.05 5,1.75
SO-G16/D10.4 [mm]
  rect 0.6x2.15 smd: 1(-4.445,-4.625) 2(-3.175,-4.625) 3(-1.905,-4.625) 4(-0.635,-4.625) 5(0.635,-4.625) 6(1.905,-4.625) 7(3.175,-4.625) 8(4.445,-4.625) 9(4.445,4.625) 10(3.175,4.625) 11(1.905,4.625) 12(0.635,4.625) 13(-0.635,4.625) 14(-1.905,4.625) 15(-3.175,4.625) 16(-4.445,4.625)
  silkscreen extent -5.42,-4.75 5.2,3.15
SWT-6 [mm]
  rect 1.5x1.5 hole 1: 1(-0.009,-0.001)
  round 1.5 hole 1: 1(5.991,-0.001) 2(-0.009,-5.001) 2(5.991,-5.001)
  silkscreen extent -0.01,-5.5 5.99,0.5
SWT-9 [mm]
  rect 2.5x2.5 hole 1.3: 1(0,0)
  round 2.5 hole 1.3: 1(12.5,0) 2(0,-5.08) 2(12.5,-5)
  silkscreen extent 1,-7.5 11.5,2.5
tlp115 [mm]
  rect 2.5x0.8 smd: 1(-0.012,-0.009)
  oval 2.5x0.8 smd: 3(-0.012,-2.549) 4(6.988,-2.549) 5(6.988,-1.279) 6(6.988,-0.009)
  silkscreen extent 2.07,-3.95 4.9,1.13
TO220_h [mm]
  round 3 hole 1.5: 1(-2.5,-15.5) 2(0,-11.5) 3(2.5,-15.5)
  silkscreen extent -5,-7.5 5,7.5
trans_ring1 [mm]
  round 3 hole 1: 1(-8.502,30.508) 2(-3.651,30.558) 3(-32.308,-6.952) 4(-37.309,-6.952) 5(-12.303,-19.505) 6(-17.354,-19.505)
  round 3 hole 1.5 unplated: 7(-2.351,-19.405)
  round 3 hole 1.5: 8(2.651,-19.405)
  silkscreen extent -15.24,-15.23 15.24,15.25
USB_B [mm]
  round 3.5 hole 2.5: 0(-5.987,-4.689) 0(6.013,-4.689)
  round 1.5 hole 0.95: 1(1.313,0.011) 2(-1.287,0.011) 3(-1.287,-1.989) 4(1.313,-1.989)
  silkscreen extent -5.99,-14.99 6.01,2.01

## Part data
A1: library part PJEZ0
BT500: library part Battery, "Multicell Battery"
C1 C2 C22 C28 C29 C37 C58: library part "Cap Semi", "Capacitor"
C3 C27 C34 C504 C505 C506 C507 C508 C509 C511 C517: library part "Cap Pol1", "Polarized Capacitor (Radial)"
C4 C5 C6 C7 C8 C9 C10 C11 C12 C13 C14 C15 C16 C17 C18 C19 C20 C21 C23 C24 C25 C26 C30 C31 C32 C33 C35 C36 C45 C46 C47 C48 C49 C50 C51 C52 C53 C54 C55 C56 C57 C60 C61 C62 C63 C64 C65 C66 C302 C303 C304 C310 C500 C501 C502 C503 C510 C512 C513 C514 C515 C516 C518 C519 C600: library part "Cap Semi", "Capacitor (Semiconductor SIM Model)"
D1: library part Diode, "Diode"
D2 D5 D6 D7 D8 D9 D10 D11: library part "D Zener", "Zener Diode"
D3 D500: library part Diode, "Default Diode"
D502 D503 D504 D510: library part 10BQ015, "Schottky Rectifier"
D505 D506 D507 D508 D509: library part 10BQ015, "Schottky Diode"
D511 D512: "Programmable Precision Reference"
DS1: "Typical INFRARED GaAs LED"
J1: library part "D Connector 9", "Receptacle Assembly, 9 Position, Right Angle"
JP1 JP10 JP11: library part "Header 5X2", "Header, 5-Pin, Dual row"
JP2 JP9: library part "Header 3", "Header, 3-Pin"
JP3 JP7: library part "Header 6", "Header, 6-Pin"
JP4: library part MHDR2X13, "Header, 13-Pin, Dual row"
JP5 JP6: library part "Header 10X2", "Header, 10-Pin, Dual row"
JP8 JP12: library part "Header 5", "Header, 5-Pin"
JP500 JP501: library part "Header 10", "Header, 10-Pin"
JP502: "Header, 3-Pin"
K1 K2: library part BS115, "Single-Pole Dual-Throw Relay"
L500: library part L1_dc_2, "Дроссель"
L501: library part "Inductor Konstr 2", "Magnetic-Core Inductor"
Q1 Q2 Q600: library part GT109
Q3: library part GT122, "Bipolar transistor"
Q4 Q6: library part GT122
Q5 Q7 Q8 Q9: "HEXFET Power MOSFET"
Q501: library part GT109, "Bipolar transistor"
Q502: library part NMOS-2, "N-Channel Power MOSFET"
Q503: library part BC847ALT1, "General Purpose Transistor NPN Silicon"
R1 R2 R3 R4 R5 R6 R7 R8 R9 R10 R11 R12 R13 R14 R15 R16 R17 R18 R19 R20 R21 R22 R23 R24 R25 R26 R27 R28 R29 R30 R31 R32 R33 R34 R35 R36 R37 R38 R39 R40 R41 R42 R43 R44 R45 R46 R47 R48 R49 R50 R51 R52 R53 R54 R55 R56 R57 R58 R59 R60 R61 R62 R63 R64 R65 R66 R67 R68 R69 R70 R71 R72 R73 R74 R75 R76 R77 R78 R79 R80 R81 R82 R83 R84 R85 R86 R87 R90 R91 R92 R93 R94 R95 R96 R97 R98 R99 R111 R112 R113 R114 R115 R116 R117 R118 R120 R121 R122 R123 R124 R125 R126 R127 R128 R129 R301 R302 R303 R304 R305 R306 R500 R501 R502 R503 R504 R505 R506 R507 R509 R510 R511 R512 R513 R514 R515 R516 R517 R518 R519 R520 R521 R522 R523 R524 R525 R526 R527 R528 R529 R530 R531 R600 R601 R602 R603 R604 R605: library part Res2, "Resistor"
R508: library part "Res Varistor", "Varistor (Voltage-Sensitive Resistor)"
S1 S2 S3 S4 S5: "Switch"
S6: library part SWT-9, "Switch"
U2 U9: "Ultra-Low Offset Voltage Operational Amplifier"
U4: library part TPS3823, "Reset IC"
U5: library part LP2980AIM5-3.3, "Micropower SOT, 50 mA Ultra Low-Dropout Regulator"
U6 U10: "8-Channel Analog Multiplexer/Demultiplexer"
U12: library part KXO-97
U13: library part LPC2368FBD100
U17: "+5V Powered, Multi-Channel RS-232 Driver/Receiver"
U18 U500: library part SBT01L
U501: "Negative Voltage Regulator"
U503: library part F00817ASD
U504: "800mA and 1A Low Dropout Positive Regulator 2.85V, 3.3V, 5V, and Adjustable"
X1 X2 X3 X4 X5 X6 X7 X8 X9 X13 X14 X15 X16 X301 X302 X303 X304 X305 X306 X307 X308 X500 X501 X502 X600 X601 X602 X603 X604 X605 X606 X607: library part Socket, "Socket"
Y1 Y3 Y4: library part XTAL, "Crystal Oscillator"

## Free pads (board coordinates)
  round 5 hole 3.5: 0(5.5,106.25) 0(5.5,4.25) 0(73.5,4.25) 0(73.5,106.25) 0(95.45,106.2) 0(95.45,4.2) 0(163.45,4.2) 0(163.45,106.2) 0(185.4,106.35) 0(185.4,4.35) 0(253.4,106.35) 0(253.4,4.35)
  round 5 hole 2: 1(237.2,59.65)
  round 3.5 hole 2.5: 51(6,98.15) 52(4.45,62.2) 53(83.4,62.2) 54(81.9,98.15)

## Via types
v1: diameter 1.1, hole 0.6, Top Layer to Bottom Layer, 590 vias
v2: diameter 1.3, hole 0.7, Top Layer to Bottom Layer, 36 vias
v3: diameter 1.5, hole 1, Top Layer to Bottom Layer, 18 vias
v4: diameter 1.5, hole 0.7, Top Layer to Bottom Layer, 16 vias
v5: diameter 1.2, hole 0.7, Top Layer to Bottom Layer, 13 vias
v6: diameter 1.4, hole 0.9, Top Layer to Bottom Layer, 3 vias
v7: diameter 1.2, hole 0.6, Top Layer to Bottom Layer, 1 vias

## Nets (pads, with @x,y where several pads share a name; then routed paths per layer and width w, separated by ;. In a path a pad name is that pad's centre, name@x,y a point inside that pad or via, vN(x,y) a via of type N, cw(c..) or ccw(c..) an arc to the next point about the centre after c; other vN are vias at no path point)
+1.8V: 
+3.3V: 